# Altium PCB PCB1.PcbDoc (part 3 of 4)
Units mm, origin at the board's own origin, x right, y up, seen from the top; angles counter-clockwise.
Board outline 152.65 x 113.28 mm, 2 copper layers (Top Layer, Bottom Layer); 145 components, 136 nets, 617 pads, 371 vias.
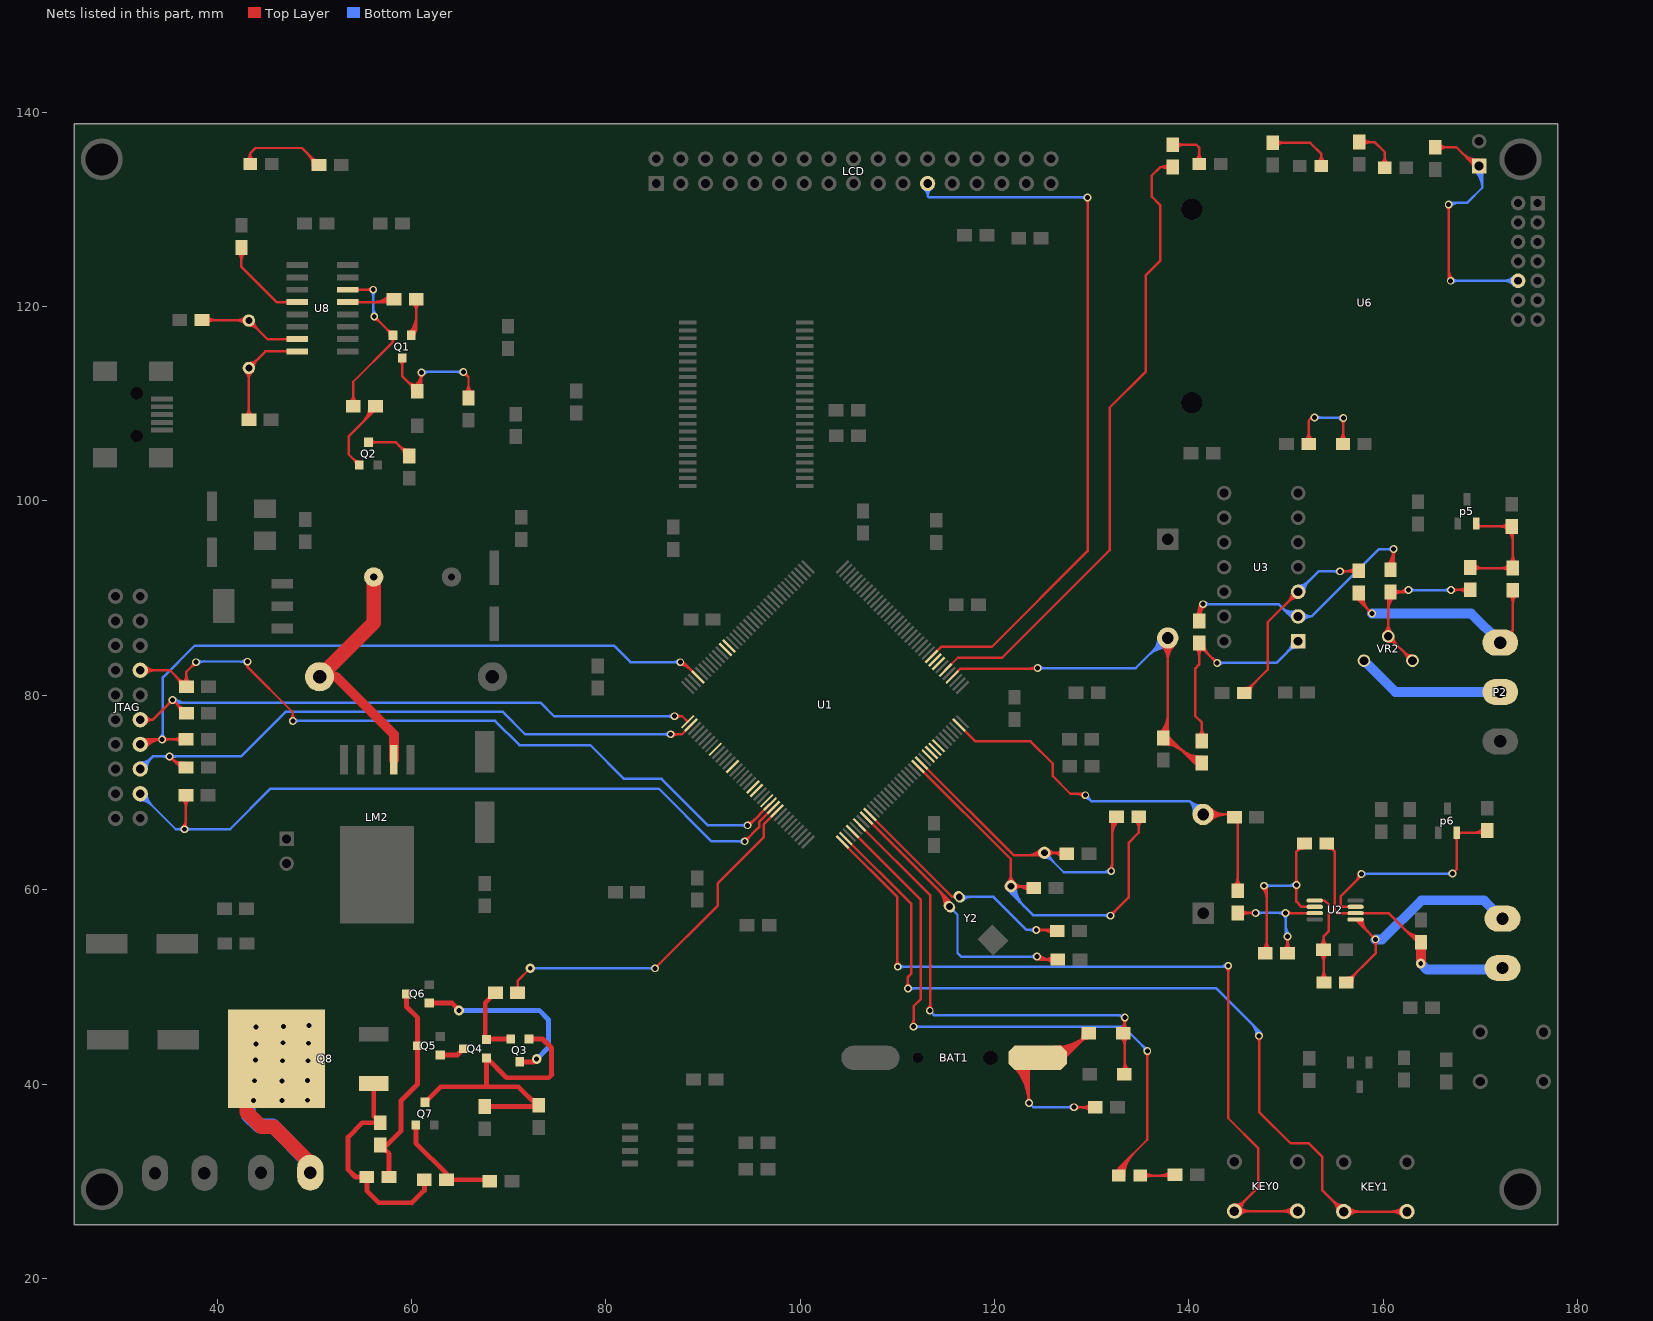
[diagram p3: the nets of this part, all layers, seen from the top]

## Via types
v1: diameter 0.8, hole 0.508, Top Layer to Bottom Layer, 296 vias
v2: diameter 1, hole 0.5, Top Layer to Bottom Layer, 75 vias

## Nets (pads, with @x,y where several pads share a name; then routed paths per layer and width w, separated by ;. In a path a pad name is that pad's centre, name@x,y a point inside that pad or via, vN(x,y) a via of type N, cw(c..) or ccw(c..) an arc to the next point about the centre after c; other vN are vias at no path point) (continued)
JTCK: JTAG.9 R10.2 U1.109 | length 71.6
  Top Layer w0.254: JTAG.9@32.08,77.495 33.376,77.495 ; JTAG.9@32.409,77.257 cw(c32.877,76.917) 32.877,77.495 cw(c32.877,78.074) JTAG.9@32.409,77.734 ; JTAG.9@32.615,77.107 cw(c33.376,76.555) 33.376,77.495 ; JTAG.9@32.615,77.883 ccw(c33.376,78.436) 33.376,77.495 ; v1@35.135,79.527 cw(c34.476,79.527) 34.942,79.061 cw(c35.408,78.595) 35.408,79.254 cw(c35.408,78.469) 35.963,79.024 ; v1@35.681,79.527 ccw(c36.213,79.527) 35.837,79.151 ; 35.746,79.241 cw(c34.662,78.157) R10.2@36.195,78.157 ; 36.053,78.935 ccw(c36.703,79.585) R10.2@36.703,78.665 ; 36.18,78.808 cw(c35.529,78.157) R10.2@36.449,78.157 ; R10.2@36.83,78.157 35.46,79.527 v1(35.408,79.527) 33.376,77.495 ; v1(87.046,77.851) 87.853,77.851 U1.109@88.414,77.29 ; v1@87.239,77.658 cw(c87.705,77.192) 87.705,77.851 cw(c87.705,78.51) v1@87.239,78.044
  Bottom Layer w0.254: v1@35.421,79.541 ccw(c36.128,80.248) 36.128,79.248 ; v1@35.601,79.72 ccw(c36.741,80.861) 36.741,79.248 ; v1@35.611,79.426 35.789,79.248 72.669,79.248 73.279,79.248 74.676,77.851 v1(87.046,77.851) ; v1@86.853,77.658 ccw(c86.387,77.192) 86.387,77.851 ccw(c86.387,78.51) v1@86.853,78.044
JTDI: JTAG.5 R8.2 U1.110 | length 75.3
  Top Layer w0.254: v1@35.103,73.438 cw(c35.103,72.779) 35.569,73.245 cw(c36.035,73.711) v1@35.376,73.711 ; v1(35.103,73.711) 36.244,72.569 R8.2@36.805,72.569 R8.2@36.651,72.415 ; v1@35.32,73.494 ccw(c36.379,74.554) R8.2@36.602,73.072 ; 35.675,73.138 ccw(c36.472,73.935) R8.2@36.64,72.821 ; 36.031,72.782 ccw(c36.565,73.316) R8.2@36.678,72.569 ; v1@86.69,75.971 87.802,75.971 U1.110@88.767,76.936 ; v1@86.858,75.804 cw(c87.263,75.399) 87.263,75.971 ; v1@86.858,76.19 ccw(c87.385,76.717) 87.385,75.971
  Bottom Layer w0.254: JTAG.5@32.08,72.415 33.376,73.711 v1(35.103,73.711) 42.443,73.711 47.066,78.334 69.342,78.334 71.679,75.997 v1(86.665,75.997) ; JTAG.5@32.08,72.822 ccw(c32.08,73.803) 32.774,73.109 ccw(c33.468,72.415) JTAG.5@32.487,72.415 ; JTAG.5@32.08,73.076 ccw(c32.08,74.67) 33.208,73.543 ccw(c34.335,72.415) JTAG.5@32.741,72.415 ; v1@34.91,73.518 ccw(c34.444,73.052) 34.444,73.711 ccw(c34.444,74.37) v1@34.91,73.904 ; v1@35.296,73.518 cw(c35.762,73.052) 35.762,73.711 cw(c35.762,74.37) v1@35.296,73.904 ; v1@86.472,75.804 ccw(c86.006,75.338) 86.006,75.997 ccw(c86.006,76.656) v1@86.472,76.19
JTDO: JTAG.13 R11.2 U1.133 | length 92.5
  Top Layer w0.254: JTAG.13@32.08,82.575 35.13,82.575 R11.2@36.628,81.078 ; JTAG.13@32.368,82.288 cw(c33.061,81.594) 33.061,82.575 cw(c33.061,83.557) JTAG.13@32.368,82.863 ; JTAG.13@32.547,82.108 cw(c33.675,80.981) 33.675,82.575 cw(c33.675,84.17) JTAG.13@32.547,83.042 ; 35.746,81.959 cw(c34.662,80.875) R11.2@36.195,80.875 ; 36.053,81.653 ccw(c36.703,82.303) R11.2@36.703,81.383 ; 36.18,81.526 cw(c35.529,80.875) R11.2@36.449,80.875 ; R11.2@36.471,81.234 ccw(c35.604,82.102) 36.83,82.102 ccw(c38.056,82.102) R11.2@37.189,81.234 ; R11.2@36.83,80.875 36.83,82.423 v1(37.821,83.414) ; v1@37.548,83.414 cw(c36.889,83.414) 37.355,82.948 cw(c37.821,82.482) v1@37.821,83.141 ; v1@42.944,83.243 cw(c42.719,82.931) 43.104,82.931 ; v1(43.104,83.464) 43.104,82.931 ; v1@43.263,83.243 ccw(c43.488,82.931) 43.104,82.931 ; v1@47.584,77.561 ccw(c47.118,78.027) 47.777,78.027 ccw(c48.436,78.027) v1@47.97,77.561 ; v1(47.777,77.368) 47.777,78.257 43.104,82.931 ; v1(94.59,66.624) 94.719,66.624 U1.133@96.899,68.805 ; v1@94.59,66.897 ccw(c94.59,67.868) 95.276,67.181 ; v1@94.863,66.624 cw(c95.21,66.624) 94.964,66.87
  Bottom Layer w0.254: v1@37.822,83.498 v1(43.104,83.464) ; v1@38.012,83.219 cw(c38.677,82.546) 38.683,83.492 ; v1@38.015,83.605 ccw(c38.28,83.867) 38.277,83.495 ; v1@42.91,83.273 ccw(c42.441,82.809) 42.445,83.469 ccw(c42.449,84.128) v1@42.912,83.659 ; v1(47.777,77.368) 68.605,77.368 71.095,74.879 78.384,74.879 81.864,71.399 85.725,71.399 90.5,66.624 v1(94.59,66.624) ; v1@47.97,77.175 cw(c48.436,76.709) 48.436,77.368 cw(c48.436,78.027) v1@47.97,77.561 ; v1@94.397,66.431 ccw(c93.931,65.965) 93.931,66.624 ccw(c93.931,67.283) v1@94.397,66.817
JTMS: JTAG.7 R9.2 U1.105 | length 83.5
  Top Layer w0.254: JTAG.7@31.997,75.014 cw(c32.869,74.398) 32.869,75.465 ; JTAG.7@32.08,74.955 32.59,75.465 v1(34.341,75.465) ; JTAG.7@32.205,74.867 cw(c33.359,74.051) 33.359,75.465 ; JTAG.7@32.412,74.721 cw(c33.85,73.704) 33.85,75.465 ; JTAG.7@32.619,74.574 cw(c34.341,73.357) v1(34.341,75.465) ; v1@34.148,75.272 ccw(c33.682,74.806) 33.682,75.465 ccw(c33.682,76.124) v1@34.148,75.658 ; v1@34.534,75.272 cw(c35,74.806) 35,75.465 cw(c35,76.124) v1@34.534,75.658 ; R9.2@36.295,74.955 R9.2@36.805,75.465 v1(34.341,75.465) ; R9.2@36.318,75.106 ccw(c35.451,74.239) 35.451,75.465 ccw(c35.451,76.691) R9.2@36.318,75.824 ; v1@87.655,83.141 cw(c87.655,81.777) 88.619,82.741 ; v1@87.655,83.395 cw(c87.655,82.645) 88.186,83.175 ; 88.049,83.312 U1.105@89.474,81.886
  Bottom Layer w0.254: v1@34.148,75.658 ccw(c33.498,76.308) 34.417,76.308 ; v1(34.341,75.465) 34.341,75.362 34.417,75.286 34.417,81.839 37.694,85.115 80.823,85.115 82.525,83.414 v1(87.655,83.414) ; 34.417,75.94 ccw(c34.816,75.94) v1@34.534,75.658 ; v1@87.462,83.221 ccw(c86.996,82.755) 86.996,83.414 ccw(c86.996,84.073) v1@87.462,83.607
JTRST: JTAG.3 R7.2 U1.134 | length 87.5
  Top Layer w0.254: R7.2@36.42,69.365 cw(c35.553,68.498) 36.779,68.498 cw(c38.006,68.498) R7.2@37.138,69.365 ; v1@36.434,66.411 ccw(c35.6,67.245) 36.779,67.245 ; v1@36.613,66.231 ccw(c36.213,66.632) 36.779,66.632 ; v1(36.627,66.218) 36.779,66.37 R7.2@36.779,69.725 ; v1(94.285,64.973) 95.758,66.446 95.758,66.956 U1.134@97.253,68.451 ; v1@94.285,65.246 ccw(c94.285,65.905) 94.751,65.439 ccw(c95.217,64.973) v1@94.558,64.973
  Bottom Layer w0.254: JTAG.3@32.08,69.215 cw(c32.08,67.621) 33.208,68.748 cw(c34.335,69.875) JTAG.3@32.741,69.875 ; JTAG.3@32.08,69.469 cw(c32.08,68.488) 32.774,69.182 cw(c33.468,69.875) JTAG.3@32.487,69.875 ; JTAG.3@32.106,69.85 JTAG.3@32.08,69.875 35.738,66.218 v1(36.627,66.218) 41.326,66.218 45.504,70.396 85.433,70.396 90.856,64.973 v1(94.285,64.973) ; v1@36.434,66.025 ccw(c35.968,65.559) 35.968,66.218 ccw(c35.968,66.877) v1@36.434,66.411 ; v1@36.82,66.025 cw(c37.286,65.559) 37.286,66.218 cw(c37.286,66.877) v1@36.82,66.411 ; v1@94.092,64.78 ccw(c93.626,64.314) 93.626,64.973 ccw(c93.626,65.632) v1@94.092,65.166
KEY0: KEY0.2 U1.1 | length 99.6
  Top Layer w0.254: U1.1@104.324,64.916 109.957,59.283 109.957,52.146 v1(110.033,52.07) ; v1@109.84,52.263 ccw(c109.558,52.545) 109.957,52.545 ; 109.957,52.913 ccw(c110.876,52.913) v1@110.226,52.263 ; v1@143.85,51.979 cw(c143.384,51.513) 144.043,51.513 cw(c144.702,51.513) v1@144.236,51.979 ; v1(144.043,52.172) 144.043,36.474 147.142,33.376 147.142,29.388 KEY0.2@144.678,26.924 KEY0.2@151.178,26.924 ; KEY0.2@144.678,27.33 ccw(c144.678,28.312) 145.372,27.618 ccw(c146.066,26.924) KEY0.2@145.085,26.924 ; KEY0.2@144.678,27.584 ccw(c144.678,29.179) 145.806,28.051 ccw(c146.933,26.924) KEY0.2@145.339,26.924 ; KEY0.2@144.966,26.637 cw(c145.66,25.943) 145.66,26.924 cw(c145.66,27.905) KEY0.2@144.966,27.211 ; KEY0.2@145.145,26.457 cw(c146.273,25.33) 146.273,26.924 cw(c146.273,28.518) KEY0.2@145.145,27.391 ; KEY0.2@150.711,26.457 ccw(c149.584,25.33) 149.584,26.924 ccw(c149.584,28.518) KEY0.2@150.711,27.391 ; KEY0.2@150.891,26.637 ccw(c150.197,25.943) 150.197,26.924 ccw(c150.197,27.905) KEY0.2@150.891,27.211
  Bottom Layer w0.254: v1(110.033,52.07) 143.942,52.07 v1(144.043,52.172) ; v1@110.226,51.877 cw(c110.692,51.411) 110.692,52.07 cw(c110.692,52.729) v1@110.226,52.263 ; 143.139,52.07 ccw(c143.139,53.076) v1@143.85,52.365 ; 143.63,52.07 cw(c143.63,51.758) v1@143.85,51.979
KEY1: KEY1.2 U1.2 | length 104.3
  Top Layer w0.254: U1.2@104.677,65.269 111.43,58.517 111.43,51.384 111.074,51.029 v1(111.074,49.835) ; v1@110.881,50.028 ccw(c110.415,50.494) 111.074,50.494 ccw(c111.733,50.494) v1@111.267,50.028 ; v1@147.025,44.765 cw(c146.559,44.299) 147.218,44.299 cw(c147.877,44.299) v1@147.411,44.765 ; v1(147.218,44.958) 147.218,37.135 150.47,33.884 152.349,33.884 153.695,32.537 153.695,29.108 KEY1.2@155.931,26.873 KEY1.2@162.431,26.873 ; KEY1.2@155.27,26.873 ccw(c153.676,26.873) 154.803,28.001 ccw(c155.931,29.128) KEY1.2@155.931,27.534 ; KEY1.2@155.524,26.873 ccw(c154.543,26.873) 155.237,27.567 ccw(c155.931,28.261) KEY1.2@155.931,27.28 ; KEY1.2@156.218,26.586 cw(c156.912,25.892) 156.912,26.873 cw(c156.912,27.854) KEY1.2@156.218,27.161 ; KEY1.2@156.398,26.406 cw(c157.525,25.279) 157.525,26.873 cw(c157.525,28.468) KEY1.2@156.398,27.34 ; KEY1.2@161.964,26.406 ccw(c160.836,25.279) 160.836,26.873 ccw(c160.836,28.468) KEY1.2@161.964,27.34 ; KEY1.2@162.143,26.586 ccw(c161.449,25.892) 161.449,26.873 ccw(c161.449,27.854) KEY1.2@162.143,27.161
  Bottom Layer w0.254: v1(111.074,49.835) 142.824,49.835 ; v1@111.267,49.642 cw(c111.733,49.176) 111.733,49.835 cw(c111.733,50.494) v1@111.267,50.028 ; 142.85,49.809 142.824,49.835 ; 146.411,46.248 cw(c145.121,44.958) v1@146.945,44.958 ; 146.845,45.814 cw(c145.988,44.958) v1@147.199,44.958 ; v1(147.218,44.958) 147.218,45.441 142.824,49.835 ; 147.278,45.381 cw(c146.856,44.958) v1@147.453,44.958
LCD_BL: LCD.23 U1.46 | length 79.7
  Top Layer w0.254: U1.46@113.516,84.007 114.497,84.988 119.71,84.988 129.565,94.844 v1(129.565,131.242) ; v1@129.372,131.049 cw(c128.906,130.583) 129.565,130.583 cw(c130.224,130.583) v1@129.758,131.049
  Bottom Layer w0.254: LCD.23@112.718,132.13 cw(c112.166,131.369) 113.106,131.369 ; LCD.23@112.867,132.335 cw(c112.528,131.867) 113.106,131.867 cw(c113.685,131.867) LCD.23@113.345,132.335 ; LCD.23@113.106,132.664 113.106,131.369 ; LCD.23@113.494,132.13 ccw(c114.046,131.369) 113.106,131.369 ; v1@129.372,131.049 ccw(c128.906,130.583) 128.906,131.242 ccw(c128.906,131.901) v1@129.372,131.435 ; v1(129.565,131.242) 113.233,131.242 113.106,131.369
LED1: DS1.K U1.4 | length 74.3
  Top Layer w0.254: U1.4@105.384,65.976 112.42,58.94 112.42,48.768 111.658,48.006 v1(111.658,45.898) ; v1@111.465,46.091 ccw(c110.999,46.557) 111.658,46.557 ccw(c112.317,46.557) v1@111.851,46.091 ; DS1.K@132.576,30.583 cw(c133.891,30.583) 132.961,31.514 ; DS1.K@132.586,31.059 ccw(c132.489,31.317) 132.765,31.317 ; DS1.K@132.765,30.583 132.765,31.317 ; DS1.K@132.83,30.583 cw(c134.759,30.583) 133.395,31.947 ; DS1.K@132.944,31.059 cw(c133.041,31.317) 132.765,31.317 ; DS1.K@133.084,30.583 cw(c135.626,30.583) 133.828,32.381 ; DS1.K@133.338,30.583 cw(c136.493,30.583) 134.262,32.814 ; v1@135.519,43.216 cw(c135.053,42.75) 135.712,42.75 cw(c136.371,42.75) v1@135.905,43.216 ; v1(135.712,43.409) 135.712,34.265 132.765,31.317
  Bottom Layer w0.254: v1(111.658,45.898) 133.274,45.898 135.712,43.459 v1(135.712,43.409) ; v1@111.851,45.705 cw(c112.317,45.239) 112.317,45.898 cw(c112.317,46.557) v1@111.851,46.091 ; 135.21,43.961 cw(c134.657,43.409) v1@135.439,43.409 ; 135.333,43.839 ccw(c135.712,44.218) v1@135.712,43.682
LED_SERIAL: R19.2 U1.42 | length 67.5
  Top Layer w0.254: U1.42@114.93,82.593 116.208,83.871 120.777,83.871 131.851,94.945 131.851,109.601 135.534,113.284 135.534,123.215 137.033,124.714 137.033,130.454 136.169,131.318 136.169,133.477 137.058,134.366 R19.2@138.327,134.366 ; R19.2@137.968,134.007 ccw(c137.1,133.14) 137.1,134.366 ccw(c137.1,135.592) R19.2@137.968,134.725
NetBAT1_1: BAT1.1 C11.2 D3.1 | length 59.6
  Top Layer w0.254: BAT1.1@121.884,41.901 cw(c118.033,38.028) v1@123.495,38.028 ; BAT1.1@122.063,42.081 cw(c118.64,38.638) 123.495,38.638 ; BAT1.1@122.242,42.261 cw(c119.247,39.249) 123.495,39.249 ; BAT1.1@122.421,42.441 cw(c119.855,39.86) 123.495,39.86 ; BAT1.1@122.6,42.622 cw(c120.462,40.471) 123.495,40.471 ; BAT1.1@122.779,42.802 cw(c121.069,41.081) 123.495,41.081 ; BAT1.1@122.958,42.982 cw(c121.676,41.692) BAT1.1@123.495,41.692 ; v1@123.353,38.242 ccw(c123.009,38.586) 123.495,38.586 ; 123.495,38.831 ccw(c124.327,38.831) v1@123.739,38.242 ; v1(123.546,38.049) 123.495,38.1 123.495,41.767 BAT1.1@124.426,42.697 ; BAT1.1@126.172,42.55 ccw(c126.222,44.5) 127.601,43.121 ; BAT1.1@126.178,42.804 ccw(c126.244,45.315) 128.02,43.539 ; BAT1.1@126.185,43.058 ccw(c126.265,46.13) 128.438,43.957 ; BAT1.1@126.192,43.312 ccw(c126.286,46.946) 128.856,44.376 ; BAT1.1@126.198,43.566 ccw(c126.307,47.761) D3.1@129.274,44.794 ; BAT1.1@126.205,43.82 ccw(c126.328,48.576) D3.1@129.692,45.212 BAT1.1@127.178,42.697 ; v1@128.345,37.594 C11.2@130.353,37.594 ; v1@128.361,37.424 cw(c128.77,37.016) 128.77,37.594 ; v1@128.361,37.81 ccw(c128.885,38.334) 128.885,37.594 ; 128.629,44.148 ccw(c127.565,45.212) D3.1@129.069,45.212 ; 128.87,44.39 cw(c129.592,43.668) D3.1@129.592,44.689 ; D3.1@129.062,44.582 ccw(c128.433,45.212) D3.1@129.323,45.212 ; C11.2@129.867,37.234 ccw(c128.999,36.367) 128.999,37.594 ccw(c128.999,38.82) C11.2@129.867,37.953
  Bottom Layer w0.254: v1(123.546,38.049) 123.977,37.617 v1(128.168,37.617) ; v1@127.975,37.424 ccw(c127.509,36.958) 127.509,37.617 ccw(c127.509,38.276) v1@127.975,37.81
NetC3_1: C3.1 U8.4 | length 11.8
  Top Layer w0.254: C3.1@42.137,125.599 cw(c41.269,124.732) 42.496,124.732 cw(c43.722,124.732) C3.1@42.855,125.599 ; C3.1@42.496,126.086 42.496,124.077 46.101,120.472 U8.4@48.225,120.472 ; U8.4@47.303,120.35 ccw(c47.008,120.055) 47.008,120.472 ccw(c47.008,120.89) U8.4@47.303,120.595
NetC4_2: C4.2 U8.8 Y3.2 | length 17.4
  Top Layer w0.254: C4.2@42.897,108.717 ccw(c42.03,109.584) 43.256,109.584 ccw(c44.483,109.584) C4.2@43.615,108.717 ; Y3.2@42.897,113.328 cw(c42.03,112.461) 43.256,112.461 cw(c44.483,112.461) Y3.2@43.615,113.328 ; C4.2@43.256,108.358 Y3.2@43.256,113.687 44.961,115.392 U8.8@48.225,115.392 ; Y3.2@43.256,114.195 ccw(c43.256,115.422) 44.123,114.554 ccw(c44.991,113.687) Y3.2@43.764,113.687 ; U8.8@47.303,115.27 ccw(c47.008,114.975) 47.008,115.392 ccw(c47.008,115.81) U8.8@47.303,115.515
NetC5_2: C5.2 U8.7 Y3.1 | length 17.7
  Top Layer w0.254: C5.2@38.43,118.616 43.207,118.616 Y3.1@43.256,118.567 45.187,116.637 48.2,116.637 U8.7@48.225,116.662 ; C5.2@38.916,118.257 cw(c39.784,117.39) 39.784,118.616 cw(c39.784,119.843) C5.2@38.916,118.976 ; 41.911,118.616 cw(c41.911,117.222) Y3.1@42.897,118.208 ; 42.148,118.616 ccw(c42.148,119.675) Y3.1@42.897,118.926 ; 42.524,118.616 cw(c42.524,117.835) Y3.1@43.077,118.388 ; Y3.1@43.256,118.059 cw(c43.256,116.833) 44.123,117.7 cw(c44.991,118.567) Y3.1@43.764,118.567 ; 46.946,116.637 ccw(c46.946,117.141) U8.7@47.303,116.785 ; 47.069,116.637 cw(c47.069,116.306) U8.7@47.303,116.54
NetC9_2: C9.2 R14.1 U1.24 Y1.2 | length 48.7
  Top Layer w0.254: U1.24@112.455,73.047 121.952,63.551 124.866,63.551 Y1.2@125.117,63.801 ; 123.286,63.551 ccw(c123.286,65.632) Y1.2@124.757,64.16 ; 123.899,63.551 ccw(c123.899,65.019) Y1.2@124.937,63.981 ; 124.494,63.551 cw(c124.494,63.179) Y1.2@124.757,63.442 ; 124.512,63.551 ccw(c124.512,64.405) Y1.2@125.117,63.801 ; Y1.2@125.476,63.442 cw(c126.343,62.575) 126.343,63.801 cw(c126.343,65.028) Y1.2@125.476,64.16 ; 125.846,63.801 cw(c125.846,62.246) C9.2@126.946,63.346 ; 126.311,63.801 ccw(c126.311,64.699) C9.2@126.946,64.064 ; 126.459,63.801 cw(c126.459,62.859) C9.2@127.125,63.525 ; C9.2@127.432,63.705 127.336,63.801 Y1.2@125.117,63.801 ; v1@131.811,62.093 ccw(c131.099,62.804) 132.105,62.804 ; v1@132.105,62.001 132.105,67.08 R14.1@132.537,67.512 ; 132.105,62.314 ccw(c132.418,62.314) v1@132.197,62.093 ; 132.105,65.549 cw(c134.372,65.549) R14.1@132.769,67.152 ; 132.105,66.163 cw(c133.759,66.163) R14.1@132.59,67.332 ; 132.105,66.776 cw(c133.146,66.776) R14.1@132.41,67.512
  Bottom Layer w0.254: Y1.2@125.117,63.293 cw(c125.117,62.067) 125.984,62.934 cw(c126.851,63.801) Y1.2@125.625,63.801 ; Y1.2@125.117,63.801 127.12,61.798 131.902,61.798 v1(132.004,61.9) ; 131.099,61.798 ccw(c131.099,62.804) v1@131.811,62.093 ; 131.59,61.798 cw(c131.59,61.486) v1@131.811,61.707
NetC10_2: C10.2 R14.2 U1.23 Y1.1 | length 58.9
  Top Layer w0.254: U1.23@112.102,72.694 121.666,63.13 Y1.1@121.666,60.35 123.852,60.35 C10.2@124.028,60.174 ; Y1.1@121.307,60.71 ccw(c120.44,61.577) 121.666,61.577 ccw(c122.892,61.577) 122.025,60.71 ccw(c122.892,61.577) 122.892,60.35 ccw(c122.892,59.124) Y1.1@122.025,59.991 ; Y1.1@122.249,60.35 cw(c122.249,58.522) C10.2@123.542,59.815 ; 122.863,60.35 cw(c122.863,59.136) C10.2@123.722,59.995 ; 123.1,60.35 ccw(c123.1,60.975) C10.2@123.542,60.533 ; v1(131.928,57.328) 133.782,59.182 133.782,64.821 134.823,65.862 R14.2@134.823,67.512 ; v1@131.928,57.601 ccw(c131.928,58.26) 132.394,57.794 ccw(c132.86,57.328) v1@132.201,57.328 ; R14.2@134.464,67.152 cw(c133.597,66.285) 134.823,66.285 cw(c136.05,66.285) R14.2@135.182,67.152
  Bottom Layer w0.254: Y1.1@121.412,60.35 ccw(c122.454,60.35) 121.717,59.613 ; Y1.1@121.92,60.35 ccw(c124.189,60.35) 122.585,58.746 ; 122.151,59.18 cw(c123.322,60.35) Y1.1@121.666,60.35 121.666,59.665 123.952,57.379 v1@131.928,57.379 ; Y1.1@122.174,60.35 ccw(c125.056,60.35) 123.018,58.312 ; 131.146,57.379 cw(c131.146,56.546) v1@131.735,57.135 ; 131.391,57.379 ccw(c131.391,57.864) v1@131.735,57.521
NetC23_2: C23.2 U1.8 Y2.2 | length 37.6
  Top Layer w0.254: U1.8@106.799,67.39 115.352,58.837 Y2.2@115.352,58.252 ; 114.198,59.991 cw(c112.549,58.342) Y2.2@114.881,58.342 ; 114.631,59.558 cw(c113.416,58.342) Y2.2@115.135,58.342 ; 115.065,59.124 cw(c114.283,58.342) Y2.2@115.389,58.342 ; v1(124.358,53.111) 124.662,52.808 C23.2@126.492,52.808 ; v1@124.372,53.125 ccw(c125.136,53.889) 125.136,52.808 ; v1@124.551,53.304 ccw(c125.749,54.502) C23.2@125.749,52.808 ; C23.2@126.006,52.449 ccw(c125.139,51.582) 125.139,52.808 ccw(c125.139,54.035) C23.2@126.006,53.167
  Bottom Layer w0.254: Y2.2@115.352,58.252 116.18,57.424 116.18,53.492 116.561,53.111 v1(124.358,53.111) ; v1@124.165,52.918 ccw(c123.699,52.452) 123.699,53.111 ccw(c123.699,53.77) v1@124.165,53.304
NetC24_2: C24.2 U1.9 Y2.1 | length 30.9
  Top Layer w0.254: U1.9@107.152,67.744 115.638,59.258 Y2.1@116.357,59.258 ; v1(124.282,55.855) 126.341,55.855 C24.2@126.441,55.755 ; v1@124.475,55.662 cw(c124.941,55.196) 124.941,55.855 cw(c124.941,56.514) v1@124.475,56.048 ; 124.846,55.855 cw(c124.846,54.287) C24.2@125.955,55.395 ; 125.329,55.855 ccw(c125.329,56.74) C24.2@125.955,56.114 ; 125.46,55.855 cw(c125.46,54.9) C24.2@126.135,55.575
  Bottom Layer w0.254: Y2.1@116.357,59.258 119.888,59.258 123.292,55.855 v1(124.282,55.855) ; Y2.1@116.537,59.079 cw(c116.971,58.645) 116.971,59.258 ; Y2.1@116.717,58.899 cw(c117.584,58.032) 117.584,59.258 ; Y2.1@116.717,59.438 ccw(c117.15,59.871) 117.15,59.258 ; v1@124.089,55.662 ccw(c123.623,55.196) 123.623,55.855 ccw(c123.623,56.514) v1@124.089,56.048
NetC47_1: C47.1 Q5.3 Q6.3 R45.2 | length 21.8
  Top Layer w0.5: C47.1@57.683,30.431 57.683,32.815 R45.2@56.767,33.731 57.48,33.731 58.928,35.179 58.928,38.303 60.63,40.005 Q5.3@60.63,43.974 ; Q6.3@59.48,49.276 59.48,47.962 60.63,46.812 Q5.3@60.63,43.974 ; Q5.3@60.598,43.942 Q5.3@60.63,43.974
NetC47_2: C47.2 Q8.1 R45.1 R46.2 | length 23.3
  Top Layer w0.5: Q8.1@56.109,40.056 56.109,36.676 R45.1@56.767,36.017 54.94,36.017 53.467,34.544 53.467,31.191 54.227,30.431 C47.2@55.397,30.431 55.397,29.032 56.642,27.788 59.995,27.788 60.02,27.762 61.316,29.058 R46.2@61.316,30.151
NetC49_2: C49.2 p5.2 R28.2 R29.2 | length 24.4
  Top Layer w0.254: R28.2@168.937,93.142 168.988,93.091 R29.2@173.331,93.091 173.331,97.279 C49.2@173.226,97.384 169.855,97.384 p5.2@169.555,97.683 ; R28.2@169.117,93.321 ccw(c169.673,93.878) 169.673,93.091 ; R28.2@169.296,92.783 cw(c170.041,92.038) 170.041,93.091 ; R28.2@169.296,93.501 ccw(c170.286,94.491) 170.286,93.091 ; p5.2@169.713,97.25 cw(c170.035,96.929) 170.035,97.384 ; p5.2@169.713,97.566 ccw(c170.153,98.005) 170.153,97.384 ; C49.2@172.867,96.897 cw(c171.747,95.777) 173.331,95.777 ; C49.2@172.867,97.024 ccw(c172,96.157) 172,97.384 ccw(c172,98.61) C49.2@172.867,97.743 ; R29.2@172.972,92.732 ccw(c172.105,91.865) 172.105,93.091 ccw(c172.105,94.317) R29.2@172.972,93.45 ; R29.2@172.972,93.577 ccw(c172.105,94.444) 173.331,94.444 ccw(c174.558,94.444) R29.2@173.69,93.577 ; C49.2@173.047,97.077 cw(c172.36,96.39) 173.331,96.39 ; 173.331,96.283 cw(c174.2,96.283) C49.2@173.586,96.897
NetC51_2: C51.2 p6.2 U2.3 | length 30.3
  Top Layer w0.254: U2.3@157.142,58.237 155.758,58.237 155.6,58.395 155.6,59.309 157.912,61.62 v1(157.734,61.62) ; 157.142,60.851 ccw(c156.373,61.62) v1@157.461,61.62 ; v1(167.132,61.671) 167.549,62.088 p6.2@167.549,65.857 170.452,65.857 C51.2@170.686,66.091 ; p6.2@167.391,65.424 cw(c167.01,65.043) 167.549,65.043 cw(c168.087,65.043) p6.2@167.706,65.424 ; p6.2@167.706,65.699 cw(c168.087,65.318) 168.087,65.857 cw(c168.087,66.395) p6.2@167.706,66.014 ; 169.202,65.857 ccw(c169.202,67.449) C51.2@170.327,66.323 ; 169.718,65.857 cw(c169.718,64.996) C51.2@170.327,65.605 ; 169.815,65.857 ccw(c169.815,66.835) C51.2@170.507,66.143
  Bottom Layer w0.254: v1(157.734,61.62) 167.081,61.62 v1(167.132,61.671) ; v1@157.927,61.427 cw(c158.393,60.961) 158.393,61.62 cw(c158.393,62.279) v1@157.927,61.813 ; 166.35,61.62 ccw(c166.35,62.453) v1@166.939,61.864 ; 166.596,61.62 cw(c166.596,61.135) v1@166.939,61.478
NetD1_2: D1.2 Q1.3 R1.1 | length 27.3
  Top Layer w0.254: Q1.3@58.801,114.446 cw(c58.25,113.895) 59.03,113.895 cw(c59.809,113.895) Q1.3@59.258,114.446 ; Q1.3@59.03,114.7 59.03,112.852 D1.2@60.579,111.303 61.011,111.735 v1(61.011,113.208) cw(c59.35,113.208) D1.2@60.285,111.835 ; 59.515,112.366 ccw(c60.579,113.43) D1.2@60.579,111.926 ; 59.757,112.125 cw(c59.035,111.403) D1.2@60.056,111.403 ; D1.2@59.949,111.933 ccw(c60.579,112.563) D1.2@60.579,111.672 ; D1.2@60.428,111.625 ccw(c59.677,112.728) 61.011,112.728 ; D1.2@60.571,111.415 ccw(c60.004,112.247) 61.011,112.247 ; v1@60.818,113.015 cw(c60.352,112.549) 61.011,112.549 cw(c61.67,112.549) v1@61.204,113.015 ; v1@65.329,113.011 cw(c65.329,112.352) 65.795,112.818 cw(c66.261,113.284) v1@65.602,113.284 ; v1(65.329,113.284) 65.861,112.752 R1.1@65.861,110.592 ; R1.1@65.501,111.078 ccw(c64.634,111.945) 65.861,111.945 ccw(c67.087,111.945) R1.1@66.22,111.078
  Bottom Layer w0.254: v1(61.011,113.208) 61.087,113.284 v1(65.329,113.284) ; v1@61.204,113.015 cw(c61.854,112.365) 61.854,113.284 ; v1@61.204,113.401 ccw(c61.486,113.683) 61.486,113.284 ; v1@65.136,113.091 ccw(c64.67,112.625) 64.67,113.284 ccw(c64.67,113.943) v1@65.136,113.477
NetD2_2: D2.2 D3.2 U1.6 | length 58.8
  Top Layer w0.254: U1.6@106.091,66.683 113.386,59.389 v1@113.386,47.422 ; v1@113.142,47.742 ccw(c112.553,48.331) 113.386,48.331 ; 113.386,48.085 ccw(c113.871,48.085) v1@113.528,47.742 ; D3.2@132.979,44.842 cw(c131.959,43.823) 133.401,43.823 ; D3.2@132.979,45.582 ccw(c131.959,46.601) v1@133.401,46.601 ; D2.2@133.08,41.365 ccw(c132.306,42.139) 133.401,42.139 ; D3.2@133.158,45.022 cw(c132.572,44.436) 133.401,44.436 ; D3.2@133.158,45.402 ccw(c132.572,45.988) 133.401,45.988 ; v1@133.208,46.645 cw(c132.742,46.179) 133.401,46.179 cw(c134.06,46.179) v1@133.594,46.645 ; D2.2@133.35,40.996 133.401,41.046 v1(133.401,46.838) ; 133.401,41.764 ccw(c134.218,41.764) D2.2@133.64,41.186 ; 133.401,42.377 ccw(c134.831,42.377) D2.2@133.82,41.365 ; 133.401,44.076 cw(c134.485,44.076) D3.2@133.718,44.842 ; 133.401,46.348 ccw(c134.485,46.348) D3.2@133.718,45.582
  Bottom Layer w0.254: v1(113.335,47.549) 113.741,47.142 113.741,47.066 132.918,47.066 133.35,46.634 133.401,46.685 v1(133.401,46.838)
NetD5_K: D5.K R16.1 | length 16.5
  Top Layer w0.254: R16.1@151.965,106.228 ccw(c151.097,107.095) 152.324,107.095 ccw(c153.55,107.095) R16.1@152.683,106.228 ; R16.1@152.324,105.869 152.324,108.28 v1@152.654,108.61 ; 152.499,108.456 cw(c152.799,108.157) v1@152.903,108.567 ; D5.K@155.494,106.228 ccw(c154.563,107.159) 155.88,107.159 ; D5.K@155.674,106.048 ccw(c155.176,106.546) 155.88,106.546 ; v1@155.687,108.341 cw(c155.221,107.875) 155.88,107.875 cw(c156.539,107.875) v1@156.073,108.341 ; D5.K@155.853,105.869 155.88,105.895 v1(155.88,108.534) ; 155.88,107.031 ccw(c157.016,107.031) D5.K@156.213,106.228
  Bottom Layer w0.254: v1(152.908,108.585) 155.829,108.585 v1(155.88,108.534) ; v1@153.101,108.392 cw(c153.567,107.926) 153.567,108.585 cw(c153.567,109.244) v1@153.101,108.778 ; 155.098,108.585 cw(c155.098,107.752) v1@155.687,108.341 ; 155.343,108.585 ccw(c155.343,109.071) v1@155.687,108.727
NetD6_K: D6.K R17.1 | length 8.5
  Top Layer w0.254: R17.1@157.529,136.931 159.106,136.931 160.146,135.891 D6.K@160.146,134.291 ; R17.1@157.888,136.572 cw(c158.756,135.705) 158.756,136.931 cw(c158.756,138.158) R17.1@157.888,137.291 ; D6.K@159.787,134.651 ccw(c158.92,135.518) 160.146,135.518 ccw(c161.372,135.518) D6.K@160.505,134.651
NetD7_K: D7.K R18.1 | length 10.6
  Top Layer w0.254: R18.1@148.614,136.855 152.476,136.855 153.62,135.711 D7.K@153.62,134.466 ; R18.1@148.973,136.496 cw(c149.84,135.629) 149.84,136.855 cw(c149.84,138.082) R18.1@148.973,137.214 ; D7.K@153.261,134.825 ccw(c152.394,135.692) 153.62,135.692 ccw(c154.847,135.692) D7.K@153.979,134.825
NetD8_K: D8.K R19.1 | length 8.4
  Top Layer w0.254: R19.1@138.327,136.652 140.767,136.652 141.045,136.374 D8.K@141.045,134.672 ; R19.1@138.686,136.293 cw(c139.553,135.426) 139.553,136.652 cw(c139.553,137.878) R19.1@138.686,137.011 ; D8.K@140.686,135.032 ccw(c139.819,135.899) 141.045,135.899 ccw(c142.272,135.899) D8.K@141.404,135.032
NetD12_K: D12.K L1.2 LM2.2 | length 25.3
  Top Layer w1: D12.K@50.533,81.915 52.247,81.915 58.191,75.971 58.191,73.373 LM2.2@58.172,73.353
  Top Layer w1.5: D12.K@50.533,81.915 56.109,87.491 L1.2@56.109,92.177
NetDS1_A: DS1.A R23.1 | length 8.1
  Top Layer w0.254: DS1.A@134.975,30.583 138.484,30.583 R23.1@138.557,30.656 ; DS1.A@135.399,30.224 cw(c136.266,29.357) 136.266,30.583 cw(c136.266,31.81) DS1.A@135.399,30.942 ; 137.027,30.583 ccw(c137.027,32.059) R23.1@138.071,31.015 ; 137.38,30.583 cw(c137.38,29.606) R23.1@138.071,30.297 ; 137.641,30.583 ccw(c137.641,31.445) R23.1@138.25,30.836
NetDS2_A: DS2.A R24.1 | length 13.4
  Top Layer w0.254: DS2.A@43.056,135.057 ccw(c42.459,135.764) 43.384,135.764 ; DS2.A@43.384,134.669 43.384,135.764 ; DS2.A@43.712,135.057 cw(c44.309,135.764) 43.384,135.764 ; 49.386,135.652 cw(c48.302,134.568) R24.1@49.835,134.568 ; 49.692,135.345 ccw(c50.343,135.995) R24.1@50.343,135.076 ; 49.819,135.218 cw(c49.169,134.568) R24.1@50.089,134.568 ; R24.1@50.47,134.568 48.716,136.322 43.942,136.322 43.384,135.764
NetJUMP1_1: JUMP1.1 R20.1 U6.10 | length 47.4
  Top Layer w0.254: R20.1@165.352,136.398 167.513,136.398 169.443,134.468 JUMP1.1@169.85,134.468 ; R20.1@165.712,136.039 cw(c166.579,135.172) 166.579,136.398 cw(c166.579,137.624) R20.1@165.712,136.757 ; v1@166.533,130.312 cw(c166.067,129.846) 166.726,129.846 cw(c167.385,129.846) v1@166.919,130.312 ; 166.726,123.193 ccw(c167.465,123.193) v1@166.942,122.67 ; 166.726,123.806 ccw(c168.078,123.806) v1@167.122,122.85 ; v1(166.726,130.505) 166.726,122.86 v1(166.929,122.657) ; 168.093,135.818 ccw(c169.85,137.576) JUMP1.1@169.85,135.091 ; 168.526,135.385 ccw(c169.85,136.709) JUMP1.1@169.85,134.837 ; 168.96,134.951 ccw(c169.85,135.841) JUMP1.1@169.85,134.583 ; 169.074,134.837 cw(c168.704,134.468) JUMP1.1@169.227,134.468
  Bottom Layer w0.254: v1(166.726,130.505) 166.929,130.708 168.656,130.708 170.18,132.232 JUMP1.1@170.18,134.442 ; v1@166.739,130.492 cw(c167.262,129.969) 167.262,130.708 ; v1@166.919,130.312 cw(c167.875,129.356) 167.875,130.708 ; v1(166.929,122.657) U6.10@173.87,122.658 ; v1@167.122,122.464 cw(c167.59,121.995) 167.59,122.658 ; v1@167.122,122.85 ccw(c167.585,123.313) 167.585,122.658 ; JUMP1.1@169.415,134.021 cw(c167.649,132.208) 170.18,132.208 ; JUMP1.1@169.592,134.203 cw(c168.235,132.81) 170.18,132.81 ; JUMP1.1@169.77,134.385 cw(c168.822,133.412) 170.18,133.412 ; JUMP1.1@170.18,133.761 cw(c170.557,133.761) JUMP1.1@170.29,134.027 ; U6.10@173.429,122.217 ccw(c172.366,121.154) 172.366,122.658 ccw(c172.366,124.162) U6.10@173.429,123.098 ; U6.10@173.609,122.397 ccw(c172.979,121.767) 172.979,122.658 ccw(c172.979,123.548) U6.10@173.609,122.919
NetP3_1: P3.1 R34.1 R35.1 U2.2 | length 38.4
  Top Layer w0.254: R35.1@154.178,64.746 155.016,63.908 155.016,57.76 155.189,57.587 U2.2@157.142,57.587 160.523,57.587 163.525,54.585 R34.1@163.882,54.585 163.882,53.186 ; R35.1@154.306,64.238 cw(c154.309,63.328) 154.953,63.972 cw(c155.403,64.422) R35.1@154.792,64.602 ; 162.189,55.921 ccw(c163.882,57.615) R34.1@163.882,55.22 ; 162.622,55.488 ccw(c163.882,56.748) R34.1@163.882,54.966 ; 163.056,55.054 ccw(c163.882,55.881) R34.1@163.882,54.712 ; R34.1@163.523,54.098 cw(c162.656,53.231) 163.882,53.231 cw(c165.109,53.231) R34.1@164.242,54.098
  Top Layer w1: v2(163.855,52.4) 163.882,52.427 R34.1@163.882,54.585
  Bottom Layer w0.254: 165.471,51.598 cw(c165.937,51.132) 165.937,51.791 cw(c165.937,52.45) 165.471,51.984
  Bottom Layer w1: v2(163.855,52.4) 164.465,51.791 172.11,51.791 P3.1@172.263,51.943
NetP3_2: P3.2 R36.2 U2.1 | length 31.5
  Top Layer w0.254: R36.2@156.185,50.443 159.233,53.491 159.233,54.846 U2.1@157.142,56.937 ; R36.2@156.312,50.951 ccw(c156.312,51.871) 156.962,51.22 ; R36.2@156.566,50.443 cw(c157.485,50.443) 156.835,51.093 ; R36.2@156.82,50.443 cw(c158.353,50.443) 157.269,51.527 ; U2.1@157.357,56.937 ccw(c157.876,56.937) 157.509,56.57 ; U2.1@157.611,56.937 ccw(c158.743,56.937) 157.942,56.136 ; U2.1@157.865,56.937 ccw(c159.61,56.937) 158.376,55.703 ; 158.711,55.368 cw(c158.232,54.889) v1@158.909,54.889 ; 158.728,55.35 ccw(c159.182,55.804) v1@159.182,55.162 ; v1@158.989,54.696 cw(c158.4,54.108) 159.233,54.108 ; 159.233,54.353 cw(c159.718,54.353) v1@159.375,54.696
  Bottom Layer w1: v1@159.182,54.864 159.868,54.864 163.906,58.903 170.383,58.903 170.532,58.754 P3.2@172.263,57.023
  other v1: 159.182,54.889
NetP10_2: P10.2 Q8.2 | length 27.2
  Top Layer w1.5: Q8.2@46.109,42.596 43.053,39.54 43.053,37.084 44.526,35.611 45.796,35.611 49.581,31.826 P10.2@49.581,30.886
  Bottom Layer w1.5: 43.205,38.176 43.205,36.805 44.323,35.687 45.695,35.687 49.581,31.801 P10.2@49.581,30.886
  other v2: 43.739,38.303 46.66,38.303 49.276,38.329 46.66,40.31 43.856,40.343 49.301,40.361 46.711,42.393 49.352,42.393 43.942,42.469 43.993,44.12 49.403,44.196 46.761,44.247 43.993,45.872 46.838,45.923 49.428,46.025
NetQ1_1: Q1.1 R3.2 U8.14 | length 26.1
  Top Layer w0.254: U8.14@53.425,121.742 v1(56.058,121.742) ; R3.2@53.641,110.114 ccw(c52.774,110.981) 54,110.981 ccw(c55.227,110.981) R3.2@54.36,110.114 ; R3.2@54,109.755 54,112.268 58.08,116.347 ; U8.14@54.348,121.62 cw(c54.643,121.325) 54.643,121.742 cw(c54.643,122.16) U8.14@54.348,121.865 ; v1@55.865,121.549 ccw(c55.399,121.083) 55.399,121.742 ccw(c55.399,122.401) v1@55.865,121.935 ; v1@56.159,118.697 cw(c56.159,118.038) 56.625,118.504 cw(c57.091,118.97) v1@56.432,118.97 ; v1(56.159,118.97) Q1.1@58.08,117.05 58.08,116.347 ; 57.486,117.644 ccw(c58.08,118.238) Q1.1@58.08,117.398 ; 57.546,117.584 cw(c57.037,117.075) Q1.1@57.757,117.075 ; Q1.1@57.876,116.774 cw(c57.53,116.347) 58.08,116.347 ; Q1.1@58.283,116.774 ccw(c58.629,116.347) 58.08,116.347
  Bottom Layer w0.254: v1@55.865,121.549 cw(c55.399,121.083) 56.058,121.083 cw(c56.717,121.083) v1@56.251,121.549 ; v1@55.966,119.163 ccw(c55.746,119.384) 56.058,119.384 ; 56.058,119.874 ccw(c57.064,119.874) v1@56.352,119.163 ; v1(56.058,121.742) 56.058,119.072 v1(56.159,118.97)
NetQ1_2: Q1.2 R2.1 | length 11.2
  Top Layer w0.254: Q1.2@59.751,117.303 ccw(c57.998,119.056) 60.477,119.056 ; Q1.2@59.931,117.124 ccw(c58.611,118.443) 60.477,118.443 ; Q1.2@59.98,117.05 60.477,117.548 ; Q1.2@60.023,117.395 ccw(c60.097,117.928) 60.477,117.548 ; Q1.2@60.11,116.944 ccw(c59.224,117.83) 60.477,117.83 ; R2.1@60.118,120.394 cw(c59.251,119.527) 60.477,119.527 cw(c61.704,119.527) R2.1@60.837,120.394 ; Q1.2@60.302,117.092 cw(c60.902,117.123) 60.477,117.548 ; R2.1@60.477,120.753 60.477,117.548
NetQ2_2: Q2.2 R3.1 | length 13.1
  Top Layer w0.254: 54.031,104.296 ccw(c54.625,104.89) Q2.2@54.625,104.05 ; 54.091,104.235 cw(c53.583,103.727) Q2.2@54.302,103.727 ; Q2.2@54.625,103.702 53.518,104.809 53.518,106.629 56.286,109.398 R3.1@56.286,109.755 ; 54.95,108.061 ccw(c53.256,109.755) R3.1@55.651,109.755 ; 55.383,108.495 ccw(c54.123,109.755) R3.1@55.905,109.755 ; 55.817,108.928 ccw(c54.99,109.755) R3.1@56.159,109.755
NetQ2_3: Q2.3 R4.2 | length 8.7
  Top Layer w0.254: Q2.3@55.575,106.052 58.339,106.052 R4.2@59.768,104.623 ; Q2.3@55.804,105.823 cw(c56.355,105.272) 56.355,106.052 cw(c56.355,106.831) Q2.3@55.804,106.28 ; 58.684,105.707 ccw(c59.768,106.791) R4.2@59.768,105.258 ; 58.99,105.4 cw(c58.34,104.75) R4.2@59.26,104.75 ; 59.117,105.273 ccw(c59.768,105.923) R4.2@59.768,105.004
NetQ3_1: Q3.1 Q4.1 R40.2 | length 7.8
  Top Layer w0.5: R40.2@68.631,49.405 67.589,48.363 67.589,44.721 Q4.1@67.723,44.587 67.77,44.634 Q3.1@70.195,44.634
NetQ3_2: Q3.2 Q4.2 Q7.3 R43.1 R44.2 | length 34.8
  Top Layer w0.5: Q7.3@61.392,38.132 62.985,39.726 70.993,39.726 72.976,37.743 R44.2@72.976,37.694 ; R43.1@67.537,37.694 R44.2@72.976,37.694 ; 67.723,39.726 Q4.2@67.723,42.687 69.77,40.64 74.117,40.64 74.435,40.957 74.397,40.996 74.397,43.713 73.476,44.634 Q3.2@72.095,44.634 ; R44.2@73.103,37.821 R44.2@72.976,37.694
NetQ3_3: Q3.3 Q6.2 | length 19.4
  Top Layer w0.5: Q6.2@61.83,48.326 64.171,48.326 v2@64.935,47.561 ; Q3.3@71.145,42.284 72.587,42.284 v2(72.873,42.57)
  Bottom Layer w0.5: v2(64.872,47.574) 71.095,47.574 73.127,47.574 74.092,46.609 74.092,43.79 v2(72.873,42.57)
NetQ4_3: Q4.3 Q5.2 | length 2.7
  Top Layer w0.5: Q5.2@62.948,42.992 64.728,42.992 Q4.3@65.373,43.637
NetQ7_2: Q7.2 R46.1 R47.2 | length 11.4
  Top Layer w0.5: Q7.2@60.442,35.782 60.442,33.919 63.602,30.759 R46.1@63.602,30.151 67.894,30.151 R47.2@68.047,29.999
NetR2_2: R2.2 U8.13 | length 9.2
  Top Layer w0.254: U8.13@53.425,120.472 57.91,120.472 R2.2@58.191,120.753 ; U8.13@54.348,120.35 cw(c54.643,120.055) 54.643,120.472 cw(c54.643,120.89) U8.13@54.348,120.595 ; 56.16,120.472 ccw(c56.16,122.658) R2.2@57.705,121.112 ; 56.773,120.472 ccw(c56.773,122.045) R2.2@57.885,120.933 ; 57.386,120.472 ccw(c57.386,121.432) R2.2@58.064,120.753
NetR25_2: R25.2 R27.2 U3.3 | length 34.6
  Top Layer w0.254: R27.2@145.694,80.237 148.107,82.65 148.107,87.528 U3.3@151.232,90.653 ; R27.2@145.821,80.745 ccw(c145.821,81.665) 146.472,81.014 ; R27.2@146.075,80.237 cw(c146.995,80.237) 146.345,80.887 ; R27.2@146.329,80.237 cw(c147.862,80.237) 146.778,81.321 ; U3.3@150.609,90.653 cw(c149.105,90.653) 150.168,89.589 cw(c151.232,88.526) U3.3@151.232,90.03 ; U3.3@150.863,90.653 cw(c149.972,90.653) 150.602,90.023 cw(c151.232,89.393) U3.3@151.232,90.284 ; v1(155.55,92.761) 157.431,92.761 R25.2@157.482,92.812 ; v1@155.743,92.568 cw(c156.209,92.102) 156.209,92.761 cw(c156.209,93.42) v1@155.743,92.954 ; 156.133,92.761 ccw(c156.133,94.161) R25.2@157.122,93.171 ; 156.378,92.761 cw(c156.378,91.708) R25.2@157.122,92.452 ; 156.746,92.761 ccw(c156.746,93.547) R25.2@157.302,92.991
  Bottom Layer w0.254: U3.3@151.232,90.653 153.34,92.761 v1(155.55,92.761) ; U3.3@151.232,91.022 ccw(c151.232,91.912) 151.862,91.283 ccw(c152.491,90.653) U3.3@151.601,90.653 ; U3.3@151.232,91.276 ccw(c151.232,92.78) 152.295,91.716 ccw(c153.359,90.653) U3.3@151.855,90.653 ; v1@155.357,92.568 ccw(c154.891,92.102) 154.891,92.761 ccw(c154.891,93.42) v1@155.357,92.954
NetR26_1: R26.1 R28.1 VR2.2 VR2.3 | length 34.4
  Top Layer w0.254: VR2.3@160.133,86.436 ccw(c159.24,87.329) 160.503,87.329 ccw(c161.765,87.329) VR2.3@160.872,86.436 ; R26.1@160.374,90.141 cw(c160.062,89.83) 160.503,89.83 ; VR2.3@160.503,85.543 cw(c160.503,84.28) 161.395,85.173 cw(c162.288,86.066) VR2.3@161.026,86.066 ; 160.503,88.718 cw(c162.515,88.718) R26.1@161.092,90.141 ; 160.503,89.331 cw(c161.902,89.331) R26.1@160.912,90.321 ; R26.1@160.503,90.397 VR2.3@160.503,86.066 VR2.2@163.003,83.566 ; R26.1@160.733,90.627 162.382,90.627 v1(162.585,90.83) ; R26.1@161.092,90.268 cw(c161.959,89.401) 161.959,90.627 cw(c161.959,91.854) R26.1@161.092,90.986 ; 161.436,90.627 ccw(c161.436,91.98) v1@162.392,91.023 ; 162.049,90.627 ccw(c162.049,91.367) v1@162.572,90.844 ; VR2.2@162.48,83.566 ccw(c161.217,83.566) 162.11,84.459 ccw(c163.003,85.352) VR2.2@163.003,84.089 ; v1@166.98,90.856 R28.1@168.937,90.856 R28.1@168.478,90.397 ; v1@167.147,90.637 cw(c167.675,90.11) 167.675,90.856 ; v1@167.147,91.023 ccw(c167.552,91.428) 167.552,90.856 ; R28.1@168.578,90.497 ccw(c167.711,89.629) 167.711,90.856 ccw(c167.711,92.082) R28.1@168.578,91.215
  Bottom Layer w0.254: v1(162.585,90.83) v1(166.954,90.83) ; v1@162.778,90.637 cw(c163.244,90.171) 163.244,90.83 cw(c163.244,91.489) v1@162.778,91.023 ; v1@166.761,90.637 ccw(c166.295,90.171) 166.295,90.83 ccw(c166.295,91.489) v1@166.761,91.023
NetR26_2: R26.2 R32.1 U3.2 | length 47.9
  Top Layer w0.254: R32.1@140.685,88.142 ccw(c139.818,89.009) 141.045,89.009 ccw(c142.271,89.009) R32.1@141.404,88.142 ; R32.1@141.045,87.655 141.045,89.051 141.376,89.383 v1(141.453,89.383) ; R32.1@141.045,87.738 cw(c143.097,87.738) v1@141.646,89.19 ; R32.1@141.045,88.352 cw(c142.484,88.352) v1@141.466,89.369 ; 141.045,88.965 cw(c141.87,88.965) v1@141.286,89.549 ; R26.2@160.375,93.401 ccw(c158.745,95.047) v1(161.061,95.047) 161.061,93.242 R26.2@160.733,92.913 ; R26.2@160.554,93.221 ccw(c159.348,94.437) 161.061,94.437 ; R26.2@160.733,93.04 ccw(c159.952,93.828) 161.061,93.828 ; v1@160.868,94.854 cw(c160.402,94.388) 161.061,94.388 cw(c161.72,94.388) v1@161.254,94.854
  Bottom Layer w0.254: v1(141.453,89.383) 149.2,89.383 150.47,88.113 U3.2@151.232,88.113 152.603,88.113 ; v1@141.646,89.19 cw(c142.112,88.724) 142.112,89.383 cw(c142.112,90.042) v1@141.646,89.576 ; 149.581,89.002 ccw(c150.532,89.953) U3.2@151.01,88.695 ; 149.858,88.724 ccw(c150.685,89.551) U3.2@151.101,88.458 ; 150.136,88.446 ccw(c150.838,89.149) U3.2@151.191,88.22 ; 150.414,88.169 ccw(c150.991,88.746) U3.2@151.281,87.983 ; U3.2@151.509,87.87 cw(c152.044,87.403) 152.044,88.113 cw(c152.044,88.822) U3.2@151.509,88.355 ; U3.2@151.701,87.703 cw(c152.603,86.914) 152.603,88.113 ; U3.2@151.701,88.522 ccw(c152.603,89.311) 152.603,88.113 ; 160.341,95.021 ccw(c160.341,95.767) v1@160.868,95.24 ; 160.464,95.021 cw(c160.464,94.449) v1@160.868,94.854 ; v1@161.061,95.021 159.512,95.021 152.603,88.113
NetR31_1: R31.1 R32.2 U3.1 | length 34.6
  Top Layer w0.254: R32.2@140.685,84.883 cw(c139.818,84.016) 141.045,84.016 cw(c142.271,84.016) R32.2@141.404,84.883 ; R31.1@140.965,75.797 ccw(c140.098,76.664) 141.324,76.664 ccw(c142.55,76.664) R31.1@141.683,75.797 ; R32.2@141.045,84.734 cw(c141.045,83.627) 141.828,84.41 ; R32.2@141.045,85.369 R32.2@141.045,85.193 ; R32.2@141.299,85.242 ccw(c142.031,85.242) R32.2@141.513,84.725 ; R31.1@141.324,75.311 141.324,77.192 140.665,77.851 140.665,82.779 141.045,83.158 R32.2@141.045,85.193 ; R32.2@141.553,85.242 ccw(c142.898,85.242) 141.947,84.291 ; v1@142.627,83.337 ccw(c141.968,83.337) 142.434,83.803 ccw(c142.9,84.269) v1@142.9,83.61 ; v1(142.9,83.337) R32.2@141.045,85.193
  Bottom Layer w0.254: v1(142.9,83.337) 148.996,83.337 U3.1@151.232,85.573 ; v1@143.093,83.144 cw(c143.559,82.678) 143.559,83.337 cw(c143.559,83.996) v1@143.093,83.53 ; U3.1@150.609,85.573 cw(c149.105,85.573) 150.168,84.509 cw(c151.232,83.446) U3.1@151.232,84.95 ; U3.1@150.863,85.573 cw(c149.972,85.573) 150.602,84.943 cw(c151.232,84.313) U3.1@151.232,85.204
NetR35_2: R35.2 R38.2 U2.6 | length 28.3
  Top Layer w0.254: v1@147.533,60.208 cw(c146.454,59.129) 147.98,59.129 ; R38.2@147.621,53.828 ccw(c146.754,54.695) 147.98,54.695 ccw(c149.207,54.695) R38.2@148.34,53.828 ; v1@147.713,60.388 cw(c147.067,59.742) 147.98,59.742 ; v1(147.726,60.401) 147.98,60.223 R38.2@147.98,53.418 ; v1@150.861,60.284 cw(c150.395,59.818) 151.054,59.818 cw(c151.713,59.818) v1@151.247,60.284 ; v1@150.861,60.67 ccw(c150.395,61.136) 151.054,61.136 ccw(c151.713,61.136) v1@151.247,60.67 ; R35.2@151.278,64.602 cw(c150.667,64.422) 151.117,63.972 cw(c151.761,63.328) R35.2@151.764,64.238 ; R35.2@151.892,64.746 151.054,63.908 v1(151.054,60.477) 151.054,58.776 151.592,58.237 U2.6@152.942,58.237
  Bottom Layer w0.254: v1(147.726,60.401) 150.978,60.401 v1(151.054,60.477) ; v1@147.919,60.208 cw(c148.385,59.742) 148.385,60.401 cw(c148.385,61.06) v1@147.919,60.594 ; 150.211,60.401 ccw(c150.211,61.32) v1@150.861,60.67 ; 150.579,60.401 cw(c150.579,60.002) v1@150.861,60.284
NetR36_1: R36.1 R37.2 U2.5 | length 16.3
  Top Layer w0.254: U2.5@152.942,58.887 153.965,58.887 154.407,58.445 154.407,55.728 153.848,55.169 R37.2@153.848,53.824 153.848,50.494 R36.1@153.899,50.443 ; R37.2@153.489,53.465 cw(c152.621,52.598) 153.848,52.598 cw(c155.074,52.598) R37.2@154.207,53.465 ; R37.2@153.489,54.183 ccw(c152.621,55.051) 153.848,55.051 ccw(c155.074,55.051) R37.2@154.207,54.183 ; R36.1@153.539,50.802 ccw(c152.795,51.547) 153.848,51.547 ; 153.848,51.179 ccw(c154.634,51.179) R36.1@154.078,50.622 ; 153.848,51.792 ccw(c155.248,51.792) R36.1@154.258,50.802
NetR38_1: R38.1 R39.2 U2.7 | length 23.9
  Top Layer w0.254: R39.2@145.007,57.607 v1(146.863,57.607) ; R39.2@145.366,57.248 cw(c146.233,56.381) 146.233,57.607 cw(c146.233,58.834) R39.2@145.366,57.966 ; v1@146.67,57.414 ccw(c146.204,56.948) 146.204,57.607 ccw(c146.204,58.266) v1@146.67,57.8 ; R38.1@149.78,53.828 ccw(c148.913,54.695) 150.139,54.695 ccw(c151.366,54.695) R38.1@150.499,53.828 ; v1(149.941,57.587) U2.7@152.942,57.587 U2.7@152.921,57.607 ; v1@149.946,55.001 cw(c149.48,54.535) 150.139,54.535 cw(c150.798,54.535) v1@150.332,55.001 ; v1@150.134,57.394 cw(c150.6,56.928) 150.6,57.587 cw(c150.6,58.246) v1@150.134,57.78 ; R38.1@150.139,53.469 v1(150.139,55.194)
  Bottom Layer w0.254: v1(146.863,57.607) 149.921,57.607 v1(149.941,57.587) 149.941,55.392 v1(150.139,55.194) ; v1@147.056,57.414 cw(c147.522,56.948) 147.522,57.607 cw(c147.522,58.266) v1@147.056,57.8 ; 149.233,57.607 cw(c149.233,56.879) 149.748,57.394 cw(c149.282,56.928) 149.941,56.928 cw(c150.6,56.928) v1@150.134,57.394 ; 149.331,57.607 ccw(c149.331,58.197) v1@149.748,57.78 ; 149.941,55.718 ccw(c150.663,55.718) v1@150.153,55.208 ; 149.941,56.331 ccw(c151.277,56.331) v1@150.332,55.387
OLED_CS: U1.122
OLED_DC: U1.117
OLED_RD: U1.128
OLED_RST: U1.132
OLED_RW: U1.129
"OV D0": U1.26
"OV D1": U1.27
"OV D2": U1.28
"OV D3": U1.29
"OV D4": U1.44
"OV D5": U1.45
"OV D6": U1.96
"OV D7": U1.97
PT100_ADC1: C26.2 D4.K R31.2 U1.40 | length 78
  Top Layer w0.254: U1.40@115.637,81.886 116.504,82.753 124.384,82.753 v1(124.435,82.804) ; 123.653,82.753 ccw(c123.653,83.586) v1@124.242,82.997 ; 123.898,82.753 cw(c123.898,82.268) v1@124.242,82.611 ; C26.2@137.006,76.102 ccw(c135.039,78.069) 137.82,78.069 ; D4.K@137.132,85.215 cw(c135.471,83.554) 137.82,83.554 cw(c140.169,83.554) D4.K@138.508,85.215 ; C26.2@137.185,75.922 ccw(c135.652,77.456) 137.82,77.456 ; D4.K@137.312,85.394 cw(c136.085,84.167) 137.82,84.167 cw(c139.556,84.167) D4.K@138.329,85.394 ; C26.2@137.365,74.981 cw(c137.365,71.919) 139.53,74.084 ; C26.2@137.365,75.235 cw(c137.365,72.786) 139.096,74.518 ; C26.2@137.365,75.489 cw(c137.365,73.653) 138.663,74.951 ; D4.K@137.492,85.574 cw(c136.698,84.78) 137.82,84.78 cw(c138.943,84.78) D4.K@138.149,85.574 ; C26.2@137.544,75.563 ccw(c136.878,76.229) C26.2@137.82,76.229 ; 137.82,76.843 cw(c136.265,76.843) 137.365,75.743 cw(c137.365,74.52) 138.229,75.385 ; D4.K@137.82,85.903 137.82,76.071 C26.2@137.365,75.616 137.998,75.616 140.589,73.025 ; 138.985,74.629 ccw(c141.324,76.967) R31.2@141.324,73.66 ; 139.419,74.195 ccw(c141.324,76.1) R31.2@141.324,73.406 ; 139.852,73.762 ccw(c141.324,75.233) R31.2@141.324,73.152 ; 140.286,73.328 ccw(c141.324,74.366) R31.2@141.324,72.898 ; R31.2@140.849,72.845 ccw(c140.589,72.747) 140.589,73.025 ; R31.2@140.849,73.205 cw(c140.589,73.303) 140.589,73.025 ; R31.2@141.324,73.025 140.589,73.025
  Bottom Layer w0.254: v1(124.435,82.804) 134.518,82.804 137.617,85.903 D4.K@137.82,85.903 ; v1@124.628,82.611 cw(c125.094,82.145) 125.094,82.804 cw(c125.094,83.463) v1@124.628,82.997 ; 135.813,84.098 cw(c137.82,82.09) D4.K@137.82,84.93 ; 136.246,84.532 cw(c137.82,82.957) D4.K@137.82,85.184 ; 136.303,84.589 ccw(c134.989,85.903) D4.K@136.847,85.903 ; 136.68,84.965 cw(c137.82,83.825) D4.K@137.82,85.438 ; 136.737,85.022 ccw(c135.856,85.903) D4.K@137.101,85.903
PT100_ADC2: C28.2 D11.K R39.1 U1.35 | length 58.4
  Top Layer w0.254: U1.35@115.843,77.438 118.021,75.26 123.698,75.26 125.984,72.974 125.984,71.679 127.787,69.875 v1@129.337,69.875 ; 128.31,69.875 cw(c128.31,68.696) v1@129.144,69.53 ; 128.923,69.875 cw(c128.923,69.309) v1@129.323,69.71 ; D11.K@141.453,67.742 144.145,67.742 145.007,66.88 R39.1@145.007,59.893 ; D11.K@141.781,67.413 cw(c142.575,66.619) 142.575,67.742 cw(c142.575,68.864) D11.K@141.781,68.071 ; D11.K@141.961,67.233 cw(c143.188,66.006) 143.188,67.742 cw(c143.188,69.478) D11.K@141.961,68.25 ; D11.K@142.141,67.054 cw(c143.802,65.393) 143.802,67.742 cw(c143.802,70.091) D11.K@142.141,68.43 ; R39.1@144.648,60.379 ccw(c143.781,61.247) 145.007,61.247 ccw(c146.233,61.247) R39.1@145.366,60.379
  Bottom Layer w0.254: v1@129.337,69.45 cw(c129.337,68.791) 129.803,69.257 cw(c130.269,69.723) v1@129.61,69.723 ; v1(129.337,69.723) 129.946,69.113 140.081,69.113 ; D11.K@140.49,67.882 ccw(c139.058,68.09) 140.081,69.113 ; D11.K@140.741,67.845 ccw(c139.683,67.999) 140.439,68.755 ccw(c141.195,69.511) D11.K@141.349,68.453 ; D11.K@141.312,68.705 cw(c141.104,70.136) 140.081,69.113 ; D11.K@141.453,67.742 140.081,69.113
"PT PIN1": P2.3 R25.1 R29.1 | length 32
  Top Layer w0.254: R25.1@157.482,90.399 ccw(c158.581,90.235) 157.795,89.449 ; R25.1@157.482,90.526 157.482,89.762 ; R25.1@157.733,90.361 ccw(c159.201,90.142) 158.151,89.092 ; R25.1@157.984,90.324 ccw(c159.821,90.049) 158.508,88.736 ; v1@158.553,88.417 ccw(c157.894,88.417) 158.36,88.883 ccw(c158.826,89.349) v1@158.826,88.69 ; v1(158.826,88.417) 157.482,89.762 ; P2.3@172.034,85.42 173.331,86.717 R29.1@173.331,90.805 ; R29.1@172.972,90.319 cw(c172.105,89.452) 173.331,89.452 cw(c174.558,89.452) R29.1@173.69,90.319 ; 157.482,89.762 cw(c157.627,89.762) 157.594,89.903 ccw(c157.627,89.762) 157.482,89.762 ; 157.482,89.762 ccw(c157.337,89.762) 157.369,89.903 cw(c157.337,89.762) 157.482,89.762
  Bottom Layer w0.254: v1@159.019,88.224 cw(c159.485,87.758) 159.485,88.417 cw(c159.485,89.076) v1@159.019,88.61
  Bottom Layer w1: v1(158.826,88.417) 169.037,88.417 P2.3@172.034,85.42
"PT PIN2": P2.2 VR2.1 | length 17.4
  Bottom Layer w0.254: VR2.1@158.003,83.043 cw(c158.003,81.78) 158.895,82.673 cw(c159.788,83.566) VR2.1@158.526,83.566
  Bottom Layer w1: VR2.1@158.003,83.566 161.228,80.34 P2.2@172.034,80.34
"PWM IN": R40.1 U1.135 | length 37.6
  Top Layer w0.254: R40.1@70.917,49.405 70.917,50.616 v2(72.212,51.911) ; v1(85.065,51.911) 91.491,58.337 91.491,60.655 96.266,65.43 96.266,66.757 U1.135@97.606,68.097
  Bottom Layer w0.254: v2@72.009,51.911 v2(72.212,51.911) v1(85.065,51.911) v1@84.98,51.826